# Altium PCB Kanaloa_v2.0.0_GPIO_b.PcbDoc
Units mil, origin at the board's own origin, x right, y up, seen from the top; angles counter-clockwise.
Board outline 6000 x 5000 mil, 2 copper layers (Top Layer, Bottom Layer), stack 11 mil thick; 43 components, 97 nets, 357 pads, 58 vias.
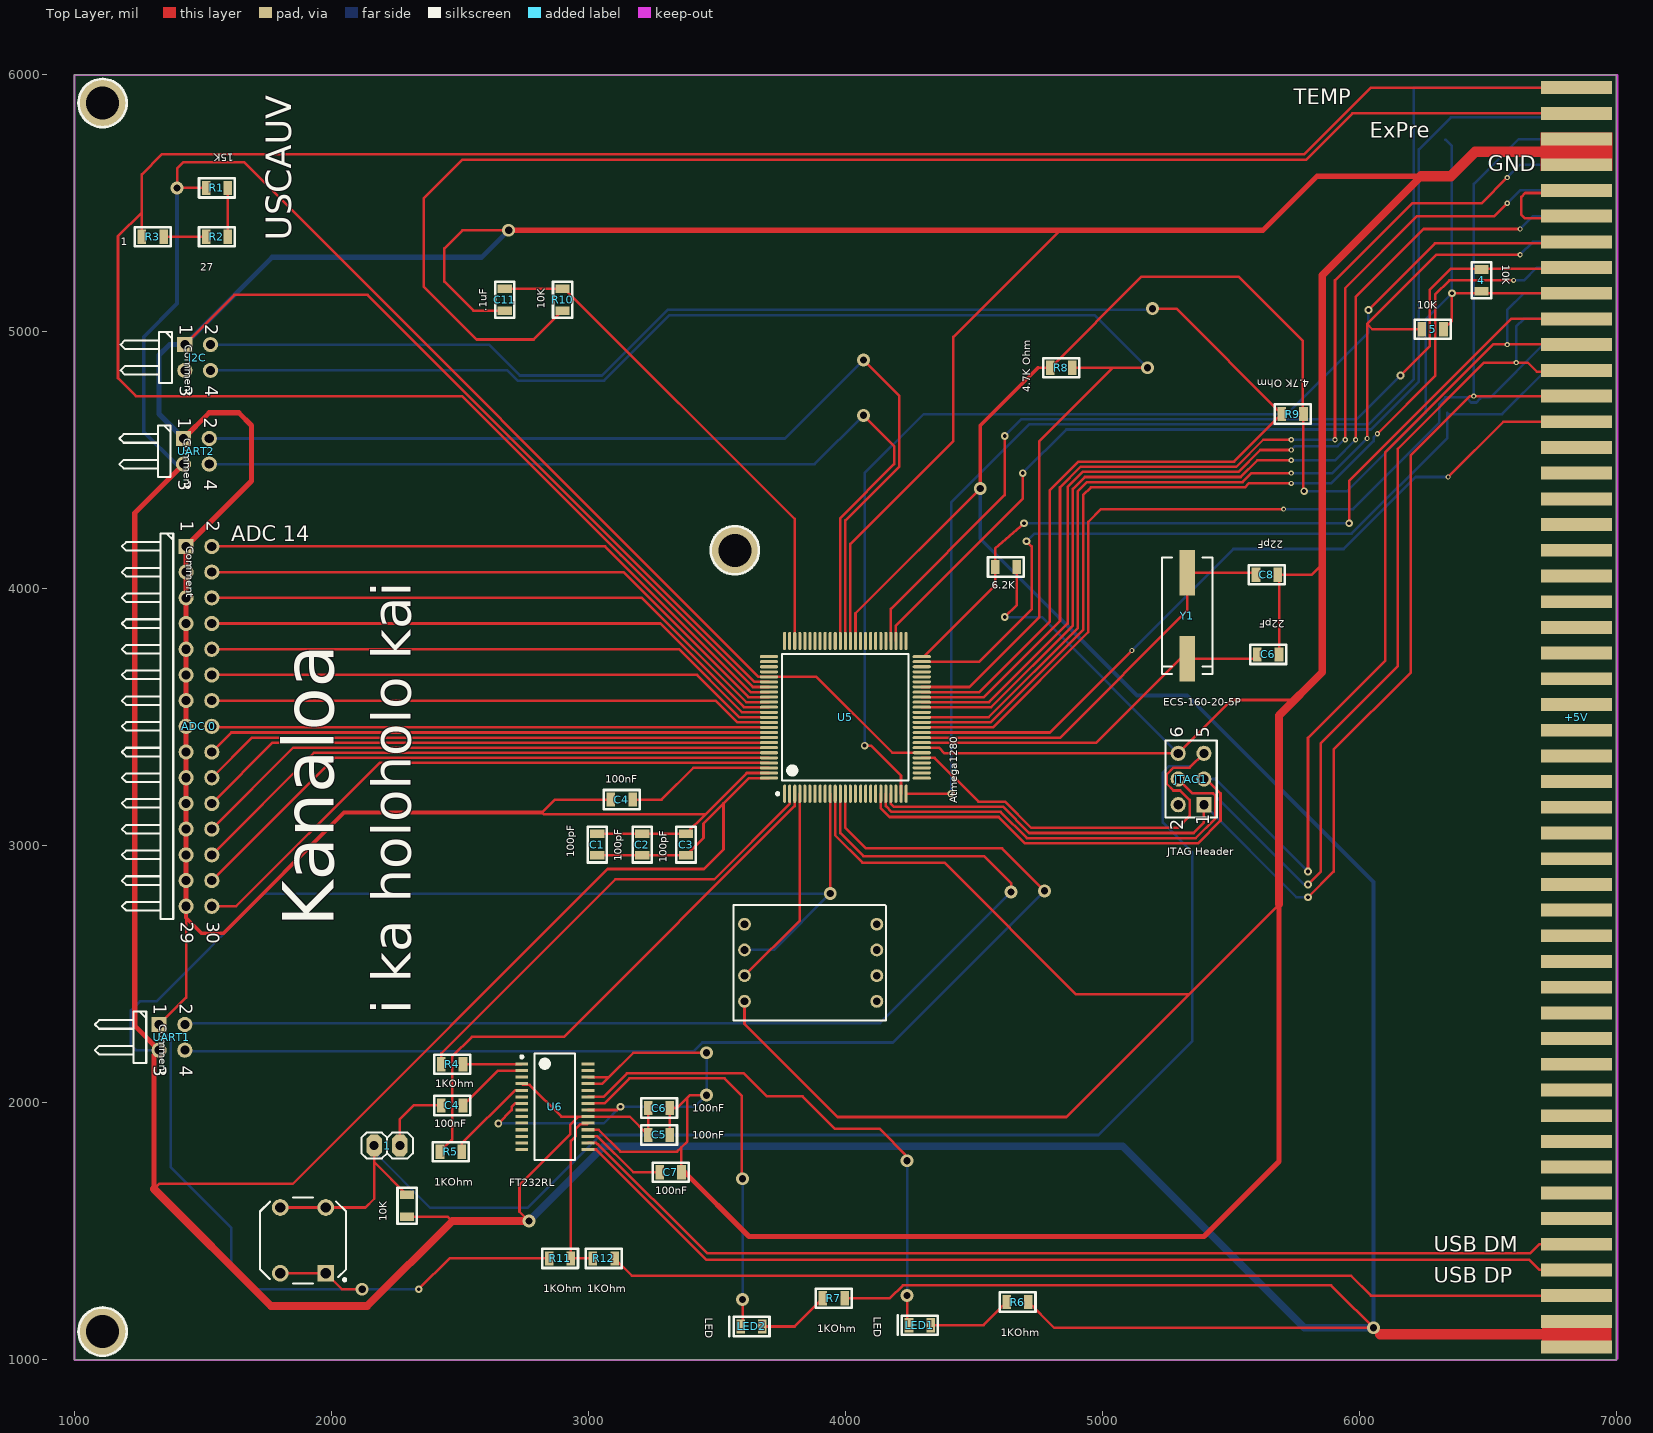
[diagram p0: Top Layer view]
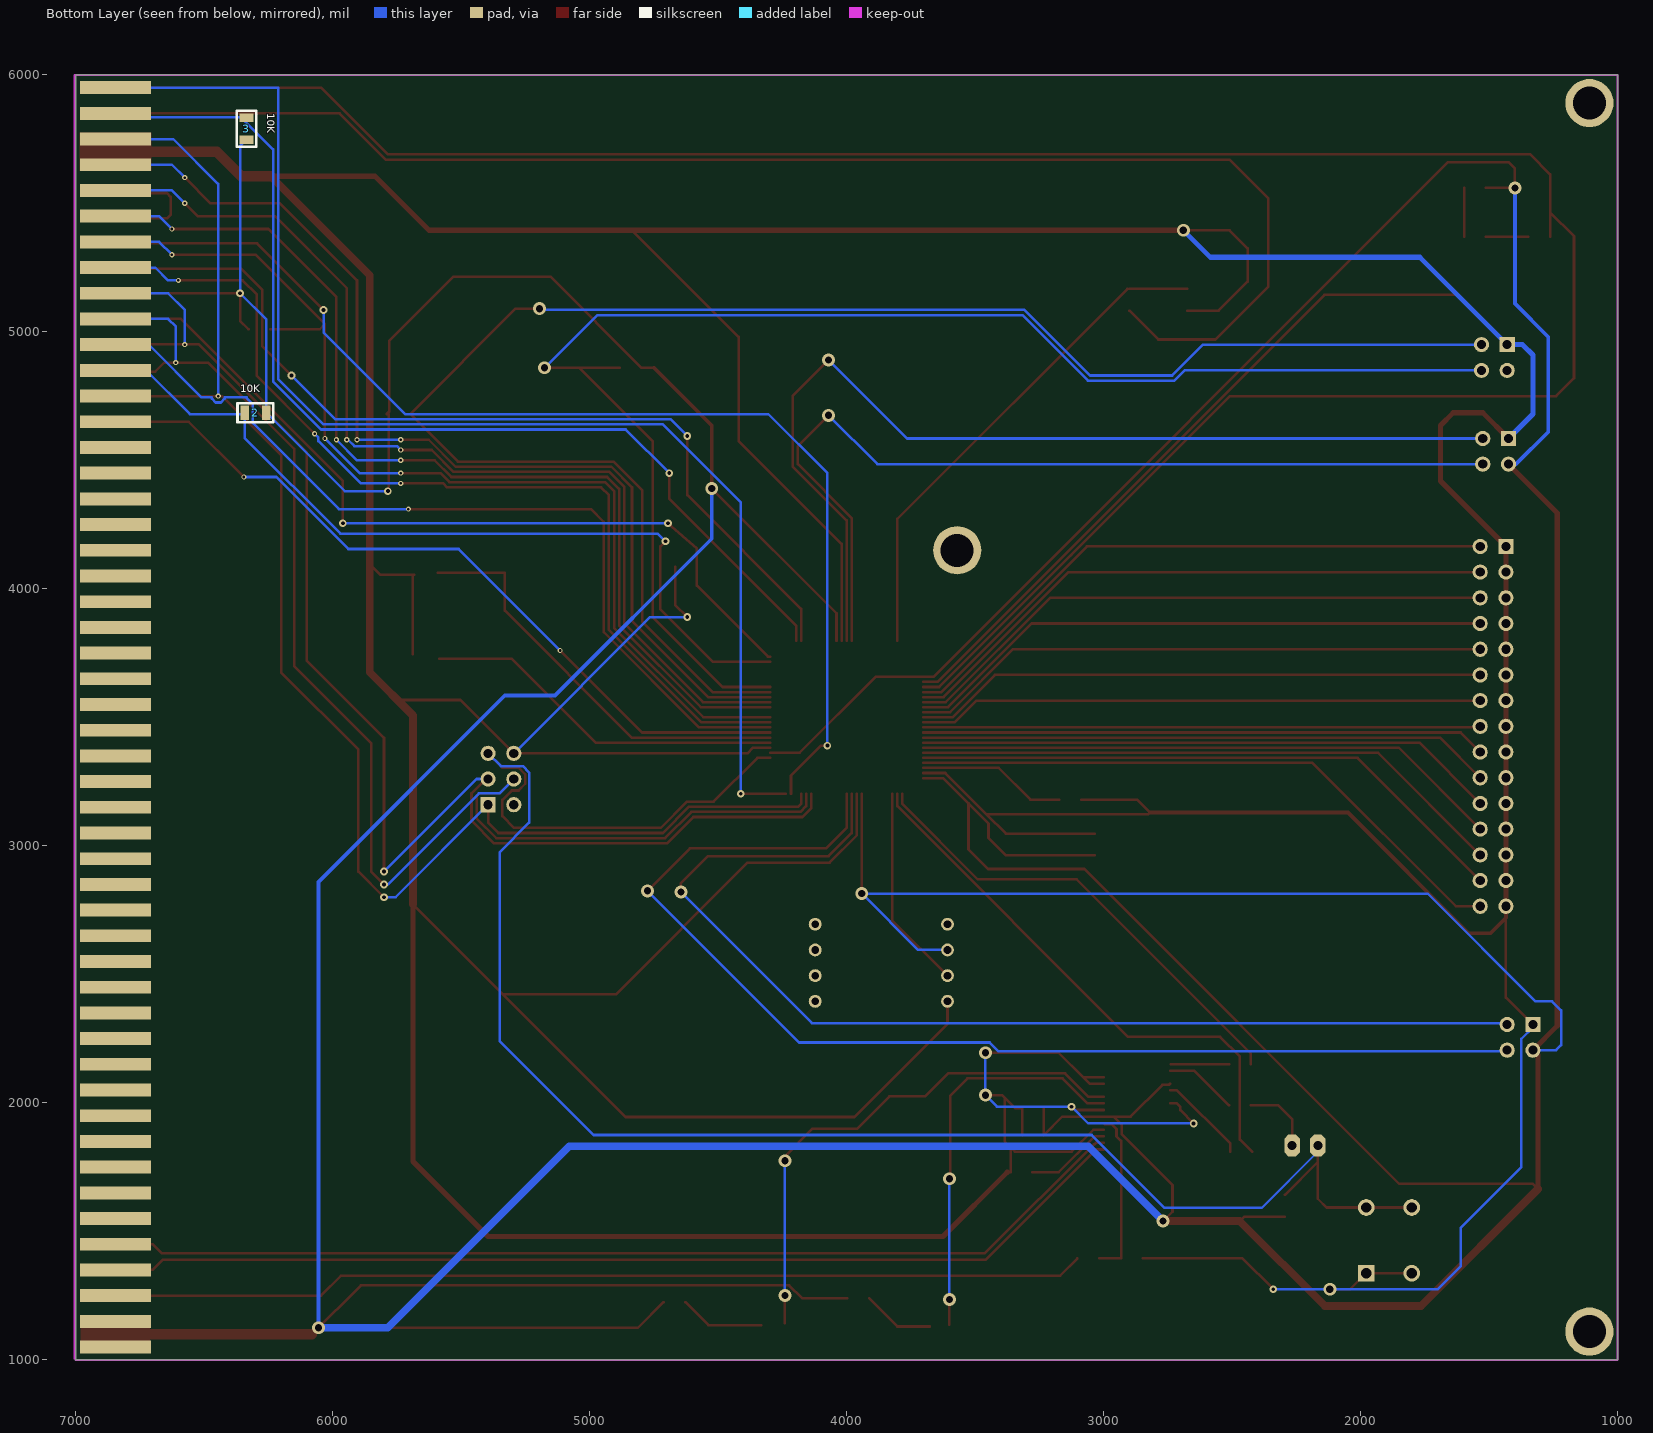
[diagram p1: Bottom Layer view, seen from below]

## Layer stack, top to bottom
Top Layer: signal copper 1.4
Dielectric: core 8.2, FR-4, Dk 4.8
Bottom Layer: signal copper 1.4

## Board outline
1000,1000 7000,1000 7000,6000 1000,6000

## Design rules (kind name [scope] priority, off if disabled: settings)
Clearance [All] p1: gap=10
DiffPairsRouting [All] p1: maxlimit=10 minlimit=10 mostfreqgap=10 maxuncoupledlength=500
PolygonConnect [All] p1: connectstyle=Relief reliefconductorwidth=10 reliefentries=4 polygonreliefangle="90 Angle"
RoutingVias [All] p1: holewidth=28 width=50 viastyle="Through Hole" minholewidth=28 minwidth=50 maxholewidth=28 maxwidth=50
SilkscreenOverComponentPads [All] p1: minsilkscreentomaskgap=10
SolderMaskExpansion [All] p1: expansion=4
Width [All] p1: maxlimit=50 minlimit=10 preferedwidth=10
26 further rules are at their usual default settings.

## Classes and differential pairs
component class Kanaloa_v2.0.0_GPIO: R1 R2 R3
differential pair NewDifferentialPair1: +"USB DP" -"USB DM"

## Components (designator, comment, footprint, x,y, rotation, side; value= is the part's Value field where it differs from the comment)
1 "" "Male 2X1" 2167,1834 r0 top
2 "10K" "R 0805 (2012) RESISTOR" 6300,4685 r0 bottom
3 "10K" "R 0805 (2012) RESISTOR" 6335,5790 r90 bottom
4 "10K" "R 0805 (2012) RESISTOR" 6475,5200 r90 top
5 "10K" "R 0805 (2012) RESISTOR" 6285,5010 r180 top
+5V "" "5645235-3 CON - duplicate" 6845,1050 r90 top
"ADC 0" "Comment" HDR2X15H 1435,4165 r270 top
C1 "100pF" "0805 (2012) Capacitor" 3035,3005 r270 top
C2 "100pF" "0805 (2012) Capacitor" 3210,3005 r270 top
C3 "100pF" "0805 (2012) Capacitor" 3380,3005 r270 top
C4 "100nF" "0805 (2012) Capacitor" 2470,1990 r0 top
C4 "100nF" "0805 (2012) Capacitor" 3130,3180 r0 top (schematic designator C5)
C5 "100nF" "0805 (2012) Capacitor" 3275,1875 r0 top
C6 "22pF" "0805 (2012) Capacitor" 5645,3745 r180 top
C6 "100nF" "0805 (2012) Capacitor" 3275,1980 r0 top
C7 "100nF" "0805 (2012) Capacitor" 3320,1730 r0 top
C8 "22pF" "0805 (2012) Capacitor" 5640,4055 r180 top
C11 ".1uF" "0805 (2012) Capacitor" 2675,5125 r270 top
I2C "Comment" HDR2X2H 1430,4950 r270 top
JTAG1 "JTAG Header" HDR2X3 5395,3160 r90 top
LED1 "LED" "LED 0805" 4290,1135 r0 top
LED2 "LED" "LED 0805" 3635,1130 r0 top
R1 "15K" "R 0805 (2012) RESISTOR" 1555,5560 r180 top
R2 "27" "R 0805 (2012) RESISTOR" 1555,5370 r0 top
R3 "1" "R 0805 (2012) RESISTOR" 1305,5370 r0 top
R4 "1KOhm" "R 0805 (2012) RESISTOR" 2470,2150 r0 top
R5 "1KOhm" "R 0805 (2012) RESISTOR" 2465,1810 r0 top
R6 "1KOhm" "R 0805 (2012) RESISTOR" 4670,1225 r0 top
R7 "1KOhm" "R 0805 (2012) RESISTOR" 3955,1240 r0 top
R8 "4.7K Ohm" "R 0805 (2012) RESISTOR" 4840,4860 r180 top
R9 "4.7K Ohm" "R 0805 (2012) RESISTOR" 5740,4680 r180 top
R10 "10K" "R 0805 (2012) RESISTOR" 2900,5125 r270 top
R11 "1KOhm" "R 0805 (2012) RESISTOR" 2890,1395 r0 top (schematic designator R5)
R12 "1KOhm" "R 0805 (2012) RESISTOR" 3060,1395 r0 top (schematic designator R5)
U5 "Atmega1280" TSQFP50P1600X1600X120-100N 4000,3500 r90 top
U6 "FT232RL" SOP65P780X200-28N 2870,1985 r0 top
UART1 "Comment" HDR2X2H 1330,2305 r270 top
UART2 "Comment" HDR2X2H 1425,4585 r270 top
Y1 "ECS-160-20-5P" CSM-7 5330,3895 r90 top
? "" B3F 1890,1465 r90 top
? "10K" "R 0805 (2012) RESISTOR" 2295,1600 r270 top
? "" SSCDANT150PGAA5 3865,2545 r0 top
? "6.2K" "R 0805 (2012) RESISTOR" 4625,4085 r180 top

## Footprints (in the part's own frame and the unit in brackets; to place one, negate y for a bottom-side part, rotate by r counter-clockwise, add the part's x,y. Pads: shape width x height; smd on the part's side, far side on the other; paste and mask are expansions set on the pad)
"0805 (2012) Capacitor" [mm] "0805 (2012) Capacitor"
  rect 0.85x1.4 smd: 1(-1.075,0) 2(1.075,0)
  silkscreen extent -1.78,-0.95 1.78,0.95, body extent -1.19,-0.65 1.19,0.65, height 0.85
"5645235-3 CON - duplicate" [mil]
  rect 50x275 smd: 0(0,0) 1(100,0) 2(200,0) 3(300,0) 4(400,0) 5(500,0) 6(600,0) 7(700,0) 8(800,0) 9(900,0) 10(1000,0) 11(1100,0) 12(1200,0) 13(1300,0) 14(1400,0) 15(1500,0) 16(1600,0) 17(1700,0) 18(1800,0) 19(1900,0) 20(2000,0) 21(2100,0) 22(2200,0) 23(2300,0) 24(2400,0) 25(2500,0) 26(2600,0) 27(2700,0) 28(2800,0) 29(2900,0) 30(3000,0) 31(3100,0) 32(3200,0) 33(3300,0) 34(3400,0) 35(3500,0) 36(3600,0) 37(3700,0) 38(3800,0) 39(3900,0) 40(4000,0) 41(4100,0) 42(4200,0) 43(4300,0) 44(4400,0) 45(4500,0) 46(4600,0) 47(4700,0) 48(4800,0) 49(4900,0)
  rect 50x275 smd far side: 50(0,0) 51(100,0) 52(200,0) 53(300,0) 54(400,0) 55(500,0) 56(600,0) 57(700,0) 58(800,0) 59(900,0) 60(1000,0) 61(1100,0) 62(1200,0) 63(1300,0) 64(1400,0) 65(1500,0) 66(1600,0) 67(1700,0) 68(1800,0) 69(1900,0) 70(2000,0) 71(2100,0) 72(2200,0) 73(2300,0) 74(2400,0) 75(2500,0) 76(2600,0) 77(2700,0) 78(2800,0) 79(2900,0) 80(3000,0) 81(3100,0) 82(3200,0) 83(3300,0) 84(3400,0) 85(3500,0) 86(3600,0) 87(3700,0) 88(3800,0) 89(3900,0) 90(4000,0) 91(4100,0) 92(4200,0) 93(4300,0) 94(4400,0) 95(4500,0) 96(4600,0) 97(4700,0) 98(4800,0) 99(4900,0)
B3F [mm]
  rect 1.65x1.65 hole 1: 1(-3.25,-2.25)
  round 1.65 hole 1: 2(3.25,-2.25) 3(-3.25,2.25) 4(3.25,2.25)
  silkscreen extent -4.25,-4.25 4.25,4.25
CSM-7 [mm] "Quartz Crystal, SM; 2 Leads; Body 11.4 x 4.8 x 5 mm (LxWxH)"
  rect 4.5x1.5 smd: 1(-4.25,0) 2(4.25,0)
  silkscreen extent -5.75,-2.5 5.75,2.5
HDR2X2H [mm] "Connector; Header; 2x2 Position; Right Angle"
  rect 1.5x1.5 hole 0.9: 1(0,0)
  round 1.5 hole 0.9: 2(0,2.54) 3(2.54,0) 4(2.54,2.54)
  silkscreen extent -1.27,-6.35 3.81,-1.27
HDR2X3 [mm] "Connector; Header; 3x2 Position"
  rect 1.5x1.5 hole 0.9: 1(0,0)
  round 1.5 hole 0.9: 2(0,2.54) 3(2.54,0) 4(2.54,2.54) 5(5.08,0) 6(5.08,2.54)
  silkscreen extent -1.27,-1.27 6.35,3.81
HDR2X15H [mm] "Connector; Header; 15x2 Position; Right Angle"
  rect 1.5x1.5 hole 0.9: 1(0,0)
  round 1.5 hole 0.9: 2(0,2.54) 3(2.54,0) 4(2.54,2.54) 5(5.08,0) 6(5.08,2.54) 7(7.62,0) 8(7.62,2.54) 9(10.16,0) 10(10.16,2.54) 11(12.7,0) 12(12.7,2.54) 13(15.24,0) 14(15.24,2.54) 15(17.78,0) 16(17.78,2.54) 17(20.32,0) 18(20.32,2.54) 19(22.86,0) 20(22.86,2.54) 21(25.4,0) 22(25.4,2.54) 23(27.94,0) 24(27.94,2.54) 25(30.48,0) 26(30.48,2.54) 27(33.02,0) 28(33.02,2.54) 29(35.56,0) 30(35.56,2.54)
  silkscreen extent -1.27,-6.35 36.83,-1.27
"LED 0805" [mm]
  rect 0.85x1.4 smd: 1(-1.075,0) 2(1.075,0)
  silkscreen extent -2.18,-0.95 1.78,0.97, body extent -1.19,-0.65 1.19,0.65, height 0.87
"Male 2X1" [mil]
  oct 60x85 hole 35: 1(0,0) 2(100,0)
  silkscreen extent -50,-50 150,50, body extent -50,-50 150,50, height 460
"R 0805 (2012) RESISTOR" [mm] "0805 (2012) Resistor"
  rect 0.85x1.4 smd: 1(-1.075,0) 2(1.075,0)
  silkscreen extent -1.78,-0.95 1.78,0.95, body extent -1.19,-0.65 1.19,0.65, height 0.85
SOP65P780X200-28N [mm] "SOP, 28-Leads, Body 10.5x5.6mm (max), Pitch 0.65mm, IPC Medium Density"
  rect 1.25x0.3 smd: 1(-3.275,4.225) 2(-3.275,3.575) 3(-3.275,2.925) 4(-3.275,2.275) 5(-3.275,1.625) 6(-3.275,0.975) 7(-3.275,0.325) 8(-3.275,-0.325) 9(-3.275,-0.975) 10(-3.275,-1.625) 11(-3.275,-2.275) 12(-3.275,-2.925) 13(-3.275,-3.575) 14(-3.275,-4.225) 15(3.275,-4.225) 16(3.275,-3.575) 17(3.275,-2.925) 18(3.275,-2.275) 19(3.275,-1.625) 20(3.275,-0.975) 21(3.275,-0.325) 22(3.275,0.325) 23(3.275,0.975) 24(3.275,1.625) 25(3.275,2.275) 26(3.275,2.925) 27(3.275,3.575) 28(3.275,4.225)
  silkscreen extent -3.4,-5.25 2,5.25, body extent -2.8,-5.25 2.8,5.25, height 2
SSCDANT150PGAA5 [mil] "Sensor Pres 150PSI GAUGE 5V ANLG"
  round 50 hole 30: 1(-257.5,150) 2(-257.5,50) 3(-257.5,-50) 4(-257.5,-150) 5(257.5,-150) 6(257.5,-50) 7(257.5,50) 8(257.5,150)
  silkscreen extent -300,-224 292,224, body extent -255,-197 255,197, height 583
TSQFP50P1600X1600X120-100N [mm] "TSQFP, 100-Leads, Body 16.3x16.3mm (max), Pitch 0.50mm, IPC Medium Density"
  oval 1.8x0.3 smd: 1(-7.55,6) 2(-7.55,5.5) 3(-7.55,5) 4(-7.55,4.5) 5(-7.55,4) 6(-7.55,3.5) 7(-7.55,3) 8(-7.55,2.5) 9(-7.55,2) 10(-7.55,1.5) 11(-7.55,1) 12(-7.55,0.5) 13(-7.55,0) 14(-7.55,-0.5) 15(-7.55,-1) 16(-7.55,-1.5) 17(-7.55,-2) 18(-7.55,-2.5) 19(-7.55,-3) 20(-7.55,-3.5) 21(-7.55,-4) 22(-7.55,-4.5) 23(-7.55,-5) 24(-7.55,-5.5) 25(-7.55,-6) 51(7.55,-6) 52(7.55,-5.5) 53(7.55,-5) 54(7.55,-4.5) 55(7.55,-4) 56(7.55,-3.5) 57(7.55,-3) 58(7.55,-2.5) 59(7.55,-2) 60(7.55,-1.5) 61(7.55,-1) 62(7.55,-0.5) 63(7.55,0) 64(7.55,0.5) 65(7.55,1) 66(7.55,1.5) 67(7.55,2) 68(7.55,2.5) 69(7.55,3) 70(7.55,3.5) 71(7.55,4) 72(7.55,4.5) 73(7.55,5) 74(7.55,5.5) 75(7.55,6)
  oval 0.3x1.8 smd: 26(-6,-7.55) 27(-5.5,-7.55) 28(-5,-7.55) 29(-4.5,-7.55) 30(-4,-7.55) 31(-3.5,-7.55) 32(-3,-7.55) 33(-2.5,-7.55) 34(-2,-7.55) 35(-1.5,-7.55) 36(-1,-7.55) 37(-0.5,-7.55) 38(0,-7.55) 39(0.5,-7.55) 40(1,-7.55) 41(1.5,-7.55) 42(2,-7.55) 43(2.5,-7.55) 44(3,-7.55) 45(3.5,-7.55) 46(4,-7.55) 47(4.5,-7.55) 48(5,-7.55) 49(5.5,-7.55) 50(6,-7.55) 76(6,7.55) 77(5.5,7.55) 78(5,7.55) 79(4.5,7.55) 80(4,7.55) 81(3.5,7.55) 82(3,7.55) 83(2.5,7.55) 84(2,7.55) 85(1.5,7.55) 86(1,7.55) 87(0.5,7.55) 88(0,7.55) 89(-0.5,7.55) 90(-1,7.55) 91(-1.5,7.55) 92(-2,7.55) 93(-2.5,7.55) 94(-3,7.55) 95(-3.5,7.55) 96(-4,7.55) 97(-4.5,7.55) 98(-5,7.55) 99(-5.5,7.55) 100(-6,7.55)
  silkscreen extent -7.67,-6.25 6.25,6.82, body extent -7,-7 7,7, height 1.2

## Part data
"ADC 0": library part "Header 15X2H"
C1 C2 C3 C6 C8: library part Cap, "Capacitor"
C4 C4 C5: library part "Capacitor (non-polarized)", "Capacitor"
JTAG1: library part "Header 3X2", "Header, 3-Pin, Dual row"
LED1 LED2: "Standard LED"
R1 R2 R3 R4 R5 R6 R7 R8 R9 R11 R12: library part Resistor, "Resistor"
UART1 UART2: library part "Header 2X2H"
Y1: library part ECS-120-32-1, "Crystal Oscillator"

## Free pads (board coordinates)
  round 187.5 hole 128.5: 0(1110,5890) 1(1110,1110) 2(3570,4150)

## Via types
v1: diameter 20, hole 10, Top Layer to Bottom Layer, 20 vias
v2: diameter 50, hole 28, Top Layer to Bottom Layer, 19 vias
v3: diameter 30, hole 15, Top Layer to Bottom Layer, 18 vias
v4: diameter 20, hole 10, Top Layer to Bottom Layer, tented bottom, 1 vias

## Nets (pads, with @x,y where several pads share a name; then routed paths per layer and width w, separated by ;. In a path a pad name is that pad's centre, name@x,y a point inside that pad or via, vN(x,y) a via of type N, cw(c..) or ccw(c..) an arc to the next point about the centre after c; other vN are vias at no path point)
3V3OUT: C7.1 U6.17 | length 336.7
  Top Layer w10: U6.17 3035.39,1869.84 3175.23,1730 C7.1
+5V: 2.1 3.1 4.1 5.1 +5V.0 +5V.1 +5V.41 ?.2@2295,1557.68 ?.2@3607.5,2595 C1.2 C2.2 C3.2 C5.1 C6.1@3232.68,1980 R1.2 R6.2 R7.2 R8.2 R9.1 U5.10 U5.31 U5.61 U5.80 U5.100 U6.4 U6.20 UART1.3 UART2.3 | length 36746.1
  Top Layer w10: 1310,1665 1330,1685 1850,1685 3075,2910 3450,2910 3525.96,2985.96 3525.96,3165 ; UART1.3@1310,2185 UART1.3 ; R1.2 v2(1400,5560) 1400,5635 1425,5660 1660,5660 3662.52,3657.48 U5.80 3887.52,3657.48 4182.8,3362.2 U5.31 ; ?.2@2295,1557.68 2452.32,1557.68 2470,1540 ; U6.4 2745.75,2069.88 2771.88,2069.88 2895.15,1946.61 2961.61,1946.61 ; v2(2768.64,1540) 2732.2,1576.44 2732.2,1680.43 2930,1878.22 2930,1915 2961.61,1946.61 ; C1.2 C2.2 C3.2 3447.98,3030.66 3447.98,3087.02 3525.96,3165 ; C6.1@3232.68,1980 C5.1 3161.06,1946.61 U6.20 2961.61,1946.61 ; U5.100 3624.74,3263.78 3525.96,3165 ; v2(3940.94,2814.06) U5.10 ; R7.2 4173.43,1240 4223.43,1290 5890,1290 6080,1100 ; U5.61 4039.37,3904.37 ; 4040,3905 v2(4525,4390) ; R6.2 4812.32,1125 v2(6055,1125) ; 4750,4860 R8.2 5152.68,5215 5530,5215 5780,4965 5780,4690 R9.1@5790,4680 ; R9.1 5782.32,4382.68 v3(5785,4380) ; 5.1 6360,5042.68 v3(6360,5150) 6843,5150 +5V.41@6845,5148
  Top Layer w15: v2(4525,4390) 4525,4635 4750,4860
  Top Layer w20: 1310,1665 UART1.3@1310,2185 ; UART1.3 1235,2300 1235,4295 UART2.3
  Top Layer w30: 1310,1665 1765,1210 2140,1210 2470,1540 v2(2768.64,1540)
  Top Layer w40: 6080,1100 6815,1100 +5V.1@6845,1130
  Bottom Layer w10: UART1.3 1240,2205 1220,2225 1220,2360 1255,2395 1320,2395 1739.06,2814.06 v2(3940.94,2814.06) 3721.89,2595 ?.2@3607.5,2595 ; 1395,4485 UART2.3 ; v3(5785,4380) 5952.68,4380 2.1 6257.68,5047.68 v3(6360,5150) 6360,5722.68 3.1
  Bottom Layer w15: 1395,4485 1270,4610 1270,4980 1400,5110 v2(1400,5560) ; v2(4525,4390) 4525,4195 5135,3585 5330,3585 6055,2860 v2(6055,1125)
  Bottom Layer w30: v2(2768.64,1540) 3060,1831.36 5078.64,1831.36 5785,1125 v2(6055,1125)
ADC0: "ADC 0.30" U5.97 | length 2398.8
  Top Layer w10: 1535,2765 1630,2765 2187.83,3322.83 U5.97
ADC1: "ADC 0.28" U5.96 | length 2365.6
  Top Layer w10: 1535,2865 2012.52,3342.52 U5.96
ADC2: "ADC 0.26" U5.95 | length 2332.3
  Top Layer w10: 1535,2965 1932.2,3362.2 U5.95
ADC3: "ADC 0.24" U5.94 | length 2299
  Top Layer w10: 1535,3065 1851.89,3381.89 U5.94
ADC4: "ADC 0.22" U5.93 | length 2265.7
  Top Layer w10: 1535,3165 1771.57,3401.57 U5.93
ADC5: "ADC 0.20" U5.92 | length 2232.5
  Top Layer w10: 1535,3265 1691.26,3421.26 U5.92
ADC6: "ADC 0.18" U5.91 | length 2199.2
  Top Layer w10: 1535,3365 1610.94,3440.94 U5.91
ADC7: "ADC 0.16" U5.90 | length 2164.3
  Top Layer w10: 1540,3460 1539.37,3460.63 U5.90
ADC8: "ADC 0.14" U5.89 | length 2202.4
  Top Layer w10: 1535,3565 3495.29,3565 3579.66,3480.63 ; 3579.98,3480.32 U5.89
ADC9: "ADC 0.12" U5.88 | length 2236.1
  Top Layer w10: 1535,3665 3423.58,3665 3588.58,3500 U5.88
ADC10: "ADC 0.10" U5.87 | length 2268.9
  Top Layer w10: 1535,3765 3351.86,3765 3596.86,3520 ; 3597.18,3519.68 U5.87
ADC11: "ADC 0.8" U5.86 | length 2302.6
  Top Layer w10: 1535,3865 3280.15,3865 3605.78,3539.37 U5.86
ADC12: "ADC 0.6" U5.85 | length 2335.9
  Top Layer w10: 1535,3965 3208.43,3965 3614.38,3559.06 U5.85
ADC13: "ADC 0.4" U5.84 | length 2369.2
  Top Layer w10: 1535,4065 3136.72,4065 3622.98,3578.74 U5.84
ADC14: "ADC 0.2" U5.83 | length 2402.4
  Top Layer w10: 1535,4165 3065,4165 3631.57,3598.43 U5.83
AREF: C4.2@3172.32,3180 U5.98 | length 581.4
  Top Layer w10: C4.2@3172.32,3180 3285,3180 3408.15,3303.15 U5.98
Blank: 5.2 +5V.93 U5.38 | length 4106.9
  Top Layer w10: U5.38 4420,3500 ; 4420,3500.32 4556.88,3500.32 4905,3848.43 4905,4380 4940,4415 5545.81,4415 5580.81,4450 v1(5735,4450) ; v1(6030,4585) 6030,5030 ; 5.2 6050,5010 6030,5030 ; v1(6625,5300) 6300,5300 6030,5030
  Bottom Layer w10: v1(5735,4450) 5895,4450 v1(6030,4585) ; v1(6625,5300) 6675,5350 +5V.93
ConStatus: +5V.44 +5V.45 | length 511.6
  Top Layer w10: +5V.44@6845,5442 6643,5442 6630,5455 6630,5525 6645,5540 +5V.45@6845,5540
CoolTemp1: 
CoolTemp2: +5V.40 ?.2@4582.68,4085 U5.50 | length 3269.5
  Top Layer w10: U5.50 4306.22,3736.22 4582.68,4012.68 4582.68,4085 4582.68,4157.68 v3(4695,4255) ; v3(5960,4255) 5960,4420 6590,5050 +5V.40
  Bottom Layer w10: v3(4695,4255) v3(5960,4255)
DCPRG: +5V.94 U5.40 | length 3975.7
  Top Layer w10: U5.40 4567.65,3539.37 4885,3856.72 4885,4388.28 4931.72,4435 5537.53,4435 5602.53,4500 v1(5735,4500) ; v1(5985,4580) 5985,5135 6250,5400 v1(6625,5400)
  Bottom Layer w10: v1(5735,4500) 5905,4500 v1(5985,4580) ; v1(6625,5400) 6675,5450 +5V.94
ExPre: +5V.48 R10.2 | length 5644.9
  Top Layer w10: R10.2 2787.32,4970 2565,4970 2360,5175 2360,5520 2510,5670 5793.28,5670 5973.28,5850 6829,5850 +5V.48@6845,5834
FanPWM: +5V.43 U5.24 | length 4512.1
  Top Layer w10: v3(4075,3390) 4100,3390 4216.54,3273.46 U5.24 ; v3(6035,5085) 6294,5344 +5V.43@6845,5344
  Bottom Layer w10: v3(4075,3390) 4075,4450 4305,4680 5717.57,4680 6035,4997.43 v3(6035,5085)
FanRPM: 4.2 +5V.42 U5.54 | length 3604.7
  Top Layer w10: U5.54 4177.17,3922.17 4620,4365 v3(4620,4595) ; v3(6160,4830) 6274.41,4944.41 6274.41,5164.41 6356,5246 +5V.42@6845,5246
  Bottom Layer w10: v3(4620,4595) 4685,4660 5990,4660 v3(6160,4830)
FlowmeterRpm: 2.2 +5V.88 U5.49 | length 3252.4
  Top Layer w10: U5.49 4521.54,3716.54 4725,3920 4725,4165 v3(4705,4185)
  Bottom Layer w10: v3(4705,4185) 4735,4215 5970,4215 6342.32,4587.32 2.2 ; 2.2@6350,4680 6555,4680 6725,4850 +5V.88
GND: "ADC 0.1" "ADC 0.3" "ADC 0.5" "ADC 0.7" "ADC 0.9" "ADC 0.11" "ADC 0.13" "ADC 0.15" "ADC 0.17" "ADC 0.19" "ADC 0.21" "ADC 0.23" "ADC 0.25" "ADC 0.27" "ADC 0.29" +5V.46 +5V.47 ?.1@1978.58,1337.05 ?.1@4667.32,4085 ?.3@1801.42,1337.05 ?.4@3607.5,2395 C1.1 C2.1 C3.1 C4.1@3087.68,3180 C5.2 C6.1@5687.32,3745 C6.2@3317.32,1980 C7.2 C8.1 C11.2 I2C.1 JTAG1.6 R11.1 U5.11 U5.32 U5.62 U5.81 U5.99 U6.7 U6.18 U6.21 U6.25 U6.26 UART1.1 UART2.1 | length 37752.4
  Top Layer w10: UART1.1 1435,2410 1435,2720 ; I2C.1 1623.43,5143.43 2141.57,5143.43 3647.2,3637.8 U5.81 ; ?.3@1801.42,1337.05 1978.58,1337.05 2040.63,1275 v2(2120,1275) ; v3(2340,1275) 2460,1395 R11.1 ; v3(2650,1920) 2701.46,1971.46 2701.46,1984.32 2714.93,1997.8 U6.7 ; C11.2 2552.32,5082.68 2440,5195 2440,5325 2510,5395 v2(2690,5395) ; U6.18 3039.57,1895.43 3125,1810 3345,1810 3362.32,1827.32 ; U6.21 3112.2,1972.2 v3(3125,1985) ; U6.25 3054.57,2074.57 3080.16,2100.16 ; U6.26 3080.16,2100.16 ; C1.1 C2.1 C3.1 3455,3122.32 ; C4.1@3087.68,3180 2870,3180 2820,3130 2827.68,3122.32 3455,3122.32 ; C5.2 3317.32,1980 3345,1980 3385,2020 ; C7.2 3362.32,1827.32 ; v2(3460,2030) 3395,2030 3385,2020 ; v2(3460,2195) 3175,2195 3080.16,2100.16 ; ?.4@3607.5,2395 3607.5,2307.5 3970,1945 4860,1945 5337.5,2422.5 ; 3614.7,3282.02 3455,3122.32 ; 3616.14,3283.46 U5.99 ; U5.11 3960.63,3041.09 4066.72,2935 4385,2935 4897.5,2422.5 5337.5,2422.5 ; U5.62 4019.68,4174.69 ; 4020,4175 4420,4575 4420,4980 4835,5395 ; U5.32 4364.68,3381.89 4386.57,3360 JTAG1.6 ; v3(4620,3890) 4667.32,3937.32 ?.1@4667.32,4085 ; JTAG1.6@5302.32,3360 JTAG1.6 ; C8.1 5815,4055 5855,4095 ; 5687.32,2772.32 5337.5,2422.5 ; C6.1@5687.32,3745 C8.1@5687.32,4050 ; 5737.5,3567.5 5502.5,3567.5 JTAG1.6 ; +5V.47@6840,5731 6871,5700 ; 3362.32,1827.32 3385,1850 3385,2020
  Top Layer w15: 1435,2765 1435,2720 1495,2660 1580,2660 2050,3130 2820,3130
  Top Layer w20: UART2.1 1525,4685 1640,4685 1690,4635 1690,4420 1435,4165 1435,4065 1435,3965 1435,3865 1435,3765 1435,3665 1435,3565 1435,3465 1435,3365 1435,3265 1435,3165 1435,3065 1435,2965 1435,2865 1435,2765 ; v2(2690,5395) 4835,5395 5625,5395 5835,5605 6240,5605 ; C7.2@3375,1730 3625,1480 5395,1480 5687.32,1772.32 5687.32,2772.32
  Top Layer w30: 5687.32,2772.32 5687.32,3507.32 5855,3675 5855,4095 5855,5220 6240,5605
  Top Layer w40: 6240,5605 6355,5605 6450,5700 6871,5700
  Bottom Layer w10: UART1.1 1330,2294.06 1374.53,2249.53 1374.53,1750 1610,1514.53 1610,1365 1700,1275 v2(2120,1275) v3(2340,1275) ; v3(2650,1920) 3060,1920 v3(3125,1985) 3415,1985 v2(3460,2030) v2(3460,2195) ; v3(4620,3890) 4765,3890 JTAG1.6
  Bottom Layer w20: UART2.1 1330,4680 1330,4910 1370,4950 I2C.1 1770,5290 2585,5290 v2(2690,5395)
GSCLK: +5V.95 U5.41 | length 4029.4
  Top Layer w10: U5.41 4559.06,3559.06 4865,3865 4865,4396.57 4923.43,4455 5529.25,4455 5614.25,4540 v1(5735,4540) ; v4(5945,4580) 5945,5170 6225,5450 6525,5450 v1(6575,5500)
  Bottom Layer w10: v1(5735,4540) 5750,4555 5915.36,4555 5940.36,4580 v4(5945,4580) ; v1(6575,5500) 6625,5550 +5V.95
Int_Press_Output: ?.3@3607.5,2495 U5.4 | length 805.3
  Top Layer w10: ?.3@3607.5,2495 3822.83,2710.33 3822.83,2967.17 3822.83,3163.35 ; 3822.83,3155 U5.4
LED_sel: 
MISO: +5V.37 +5V.97 JTAG1.1 U5.22 | length 5870.4
  Top Layer w10: 4177.17,3163.35 U5.22 ; 4177.42,3163.09 4188.19,3152.32 4612.68,3152.32 4715,3050 5355,3050 5395,3090 JTAG1.1 ; v3(5800,2800) 5900,2900 5900,3375 6200,3675 6200,4520 6430,4750 v1(6445,4750) 6839,4750 +5V.37@6845,4756
  Bottom Layer w10: JTAG1.1 5755,2800 v3(5800,2800) ; v1(6445,4750) 6445,5575 6620,5750 +5V.97
"MISO_Sensor Boom": 
MOSI: +5V.38 +5V.90 JTAG1.4 U5.21 | length 5436.6
  Top Layer w10: 4157.42,3163.29 4157.42,3154.81 4179.91,3132.32 4604.39,3132.32 4706.72,3030 5363.28,3030 5439.53,3106.24 5439.53,3195.74 5430.74,3204.53 5350.47,3204.53 JTAG1.4 ; 4157.48,3154.87 U5.21 ; v3(5800,2850) 5850,2900 5850,3400 6150,3700 6150,4545 6485,4880 v1(6610,4880) 6655,4880 6690,4845 6836,4845 +5V.38@6845,4854
  Bottom Layer w10: JTAG1.4 5350.47,3204.53 5430.74,3204.53 5785.27,2850 v3(5800,2850) ; v1(6610,4880) 6610,5020 6640,5050 +5V.90
"MOSI_Sensor Boom": 
Net_1: 
Net_2: U5.9
Net_5: U5.8
NetC4_2: C4.2@2512.32,1990 U6.2 | length 285
  Top Layer w10: C4.2@2512.32,1990 2648.07,2125.75 U6.2
NetC7_1: C11.1 R10.1 U5.73 | length 1966
  Top Layer w10: C11.1 R10.1 ; R10.1@2907.68,5167.32 3803.15,4271.85 U5.73
NetR1_1: R1.1 R2.2 | length 190
  Top Layer w10: R2.2 R1.1
NetR2_1: R2.1 R3.2 | length 165.4
  Top Layer w10: R3.2 R2.1
NetR4_2: R4.2 U6.1 | length 227.4
  Top Layer w10: R4.2 U6.1@2739.72,2150
NetR5_2: R5.2 U6.5 | length 351.1
  Top Layer w10: R5.2 2507.32,1841.37 2714.93,2048.98 U6.5
NetU5_82: 
NetU5_83: 
NetU5_84: 
NetU5_85: 
NetU5_86: 
NetU5_87: 
NetU5_88: 
NetU5_89: 
NetU5_90: 
NetU5_91: 
NetU5_92: 
NetU5_93: 
NetU5_94: 
NetU5_95: 
NetU5_96: 
NetU5_97: 
NetUC_RESET1_1: 
PD7: 
prejumpreset: 1.2 C4.1@2427.68,1990 | length 285.6
  Top Layer w10: 1.2 2267,1937 2320,1990 C4.1@2427.68,1990
PumpPWM: +5V.99 U5.25 | length 5082.6
  Top Layer w10: U5.25 v3(4412.24,3202.76)
  Bottom Layer w10: v3(4412.24,3202.76) 4412.24,4337.24 4715,4640 6035,4640 6211.72,4816.72 6211.72,5950 6827,5950 +5V.99@6845,5932
PumpRPM: 3.2 +5V.98 U5.53 | length 4114.4
  Top Layer w10: U5.53 4196.85,3856.85 4690,4350 v3(4690,4450)
  Bottom Layer w10: v3(4690,4450) 4860,4620 6045,4620 6231.72,4806.72 6231.72,5709.9 6355.82,5834 +5V.98@6845,5834
RESET: 1.1 ?.1@2295,1642.32 ?.2@1978.58,1592.95 ?.4@1801.42,1592.95 JTAG1.5 U5.30 | length 7186.1
  Top Layer w10: ?.4@1801.42,1592.95 1978.58,1592.95 2130.63,1592.95 2131.79,1591.79 2167,1627 2167,1770.32 ; 1.1 2167,1770.32 ; ?.1@2295,1642.32 2167,1770.32 ; U5.30 4347.48,3342.52 4517.68,3172.32 4620.96,3172.32 4723.28,3070 5294.06,3070 5339.53,3115.47 5339.53,3178.44 5302.5,3215.47 5276.56,3215.47 5250.47,3241.56 5250.47,3278.44 5276.56,3304.53 5339.53,3304.53 JTAG1.5
  Bottom Layer w10: 1.1 2167,1809.79 2385,1591.79 2763.87,1591.79 3047.07,1875 4985,1875 5350.47,2240.47 5350.47,2974.53 5235,3090 5235,3285 5260,3310 5345,3310 JTAG1.5
reset#: R11.2 R12.1 U6.19 | length 654.3
  Top Layer w10: U6.19 2994.25,1916.34 2968.12,1916.34 2950,1898.22 2950,1869.94 2932.32,1852.26 R11.2 R12.1
RLED: LED2.2 R7.1 | length 280.9
  Top Layer w10: LED2.2 3802.68,1130 R7.1
RX2: U5.12 UART1.2 | length 4359.6
  Top Layer w10: U5.12 3980.32,3049.68 4070,2960 4540,2960 4645,2855 v2@4645,2825
  Bottom Layer w10: UART1.2@1425,2310 4135,2310 v2(4645,2820)
RX3: U5.63 UART2.2 | length 3909.1
  Top Layer w10: U5.63 4000,4266.72 4210,4476.72 4210,4750 v2(4070,4890)
  Bottom Layer w10: UART2.2 3765,4585 v2(4070,4890)
"RX LED": LED2.1 U6.22 | length 1547
  Top Layer w10: U6.22 3062.8,1997.8 3160,2095 3530,2095 3597.68,2027.32 v2@3597.68,1715 ; LED2.1@3600,1137.32 v2(3600,1235)
  Bottom Layer w10: v2(3600,1235) v2(3600,1705)
SCK: +5V.39 +5V.91 JTAG1.3 U5.20 | length 5325
  Top Layer w10: U5.20 4137.8,3146.15 4171.62,3112.32 4596.11,3112.32 4698.43,3010 5371.57,3010 5459.53,3097.96 5459.53,3204.03 5403.55,3260 JTAG1.3 ; v3(5800,2900) 5800,3420 6100,3720 6100,4530 6522,4952 +5V.39@6845,4952
  Bottom Layer w10: JTAG1.3 5440,3260 v3(5800,2900) ; v1(6575,4950) 6575,5085 6640,5150 +5V.91
"SCK_Sensor Boom": 
SCL: I2C.2 R9.2 U5.43 | length 6640.7
  Top Layer w10: U5.43 4521.71,3598.43 ; 4523.28,3600 4795,3871.72 4795,4383.14 4906.86,4495 5512.68,4495 R9.2 5287.68,5090 v2(5195,5090)
  Bottom Layer w10: I2C.2 2613.43,4950 2733.43,4830 3053.28,4830 3308.28,5085 5190,5085 v2(5195,5090)
SCLK: 
SDA: I2C.4 R8.1 U5.44 | length 5793.2
  Top Layer w10: U5.44 4483.11,3618.11 4755,3890 4755,4575 5040,4860 ; R8.1 5040,4860 ; v2@5165,4860 5040,4860
  Bottom Layer w10: I2C.4 2685.15,4850 2725.15,4810 3061.57,4810 3316.57,5065 4970,5065 v2(5175,4860)
SensorP_sel: +5V.36 U5.35 | length 3048.6
  Top Layer w10: U5.35 4795.94,3440.94 v1(5115,3760) ; v1(6345,4435) 6560,4650 +5V.36
  Bottom Layer w10: v1(5115,3760) 5510,4155 5938.28,4155 6218.28,4435 v1(6345,4435)
Sin: 
Sout: 
SS: 
TEMP: +5V.49 R3.1 U5.82 | length 9870.5
  Top Layer w10: R3.1 1262.68,5465 ; 3126.64,4131.64 2993.28,4265 ; U5.82 3640.17,3618.11 2993.28,4265 ; +5V.49@6842,5935 6827,5950 6045,5950 5785,5690 1340,5690 1262.68,5612.68 1262.68,5465 ; 1262.68,5465 1170,5372.32 1170,4820 1240,4750 2508.28,4750 2993.28,4265
"Thermal Sensor Resistor": 
TLED: LED1.2 R6.1 | length 332.6
  Top Layer w10: LED1.2 4537.68,1135 R6.1
TX2: U5.13 UART1.4 | length 4618.1
  Top Layer w10: U5.13 4000,3070 4080,2990 4610,2990 v2(4775,2825)
  Bottom Layer w10: UART1.4@1425,2200 3408.43,2200 3443.43,2235 4185,2235 v2(4775,2825)
TX3: U5.64 UART2.4 | length 3638
  Top Layer w10: U5.64 3980.32,4275.31 4190,4485 4190,4555 v2(4070,4675)
  Bottom Layer w10: UART2.4 3880,4485 v2(4070,4675)
"TX LED": LED1.1 U6.23 | length 2048.6
  Top Layer w10: U6.23 3058.39,2023.39 3150,2115 3605,2115 3695,2025 3833.43,2025 3958.43,1900 4132.68,1900 v2@4242.68,1790 ; LED1.1@4240,1142.68 v2(4240,1250)
  Bottom Layer w10: v2(4240,1250) v2(4240,1775)
UC_RX: R4.1 U5.2 | length 1839.9
  Top Layer w10: R4.1 2427.68,2192.68 3105,2870 3490.12,2870 3783.46,3163.35 U5.2
UC_TX: R5.1 U5.3 | length 2174.1
  Top Layer w10: R5.1 2470,1857.32 2470,2180 2546.6,2256.6 2905,2256.6 3802.83,3154.43 ; 3803.15,3154.75 U5.3
USB5V: +5V.2 R12.2 | length 3802.7
  Top Layer w10: R12.2 3170,1327.32 5967.68,1327.32 6045,1250 +5V.2
"USB DM": +5V.4 U6.16 | length 4038.4
  Top Layer w10: U6.16 3030,1844.25 3035.59,1838.66 3038.28,1838.66 3461.95,1415 6665,1415 6700,1450 +5V.4
"USB DP": +5V.3 U6.15 | length 4040.2
  Top Layer w10: U6.15 3030,1818.66 3458.66,1390 6660,1390 6700,1350 +5V.3
VCC:  | length 7.1
  Top Layer w10: 5290,3165 5295,3160
VPRG: +5V.89 U5.36 | length 3482.2
  Top Layer w10: U5.36 4573.77,3460.63 4945,3831.86 4945,4260 4995,4310 v1(5705,4310)
  Bottom Layer w10: v1(5705,4310) 5975,4310 6310,4645 6310,4718.18 6335,4743.18 6335,4745 6420,4745 6420,4739.64 6434.64,4725 6455.36,4725 6470,4739.64 6470,4745 6510.36,4745 6715.36,4950 +5V.89
XERR: +5V.96 U5.42 | length 4073.4
  Top Layer w10: U5.42 4538.74,3578.74 4835,3875 4835,4394.85 4915.15,4475 5520.96,4475 5625.96,4580 v1(5735,4580) ; v1(5905,4580) 5905,5200 6205,5500 6475,5500 v1(6575,5600)
  Bottom Layer w10: v1(5735,4580) v1(5905,4580) ; v1(6575,5600) 6625,5650 +5V.96
XLat: +5V.92 U5.37 | length 3781.8
  Top Layer w10: U5.37 4565.17,3480.32 4925,3840.15 4925,4365 4955,4395 5554.1,4395 5569.1,4410 v1(5735,4410) ; v1(6070,4603.28) 6295,4828.28 6295,5145 6350,5200 v1(6600,5200)
  Bottom Layer w10: v1(5735,4410) 5890.36,4410 6055,4574.64 6055,4588.28 v1(6070,4603.28) ; v1(6600,5200) 6640,5200 6690,5250 +5V.92
XTAL1: C6.2@5602.68,3745 U5.33 Y1.1 | length 1423.2
  Top Layer w10: U5.33 4976.57,3401.57 5302.68,3727.68 Y1.1 5585.35,3727.68
XTAL2: C8.2 U5.34 Y1.2 | length 1644.9
  Top Layer w10: U5.34 4836.26,3421.26 5330,3915 Y1.2 C8.2@5590.35,4062.32
pads on no net: +5V.5 +5V.6 +5V.7 +5V.8 +5V.9 +5V.10 +5V.11 +5V.12 +5V.13 +5V.14 +5V.15 +5V.16 +5V.17 +5V.18 +5V.19 +5V.20 +5V.21 +5V.22 +5V.23 +5V.24 +5V.25 +5V.26 +5V.27 +5V.28 +5V.29 +5V.30 +5V.31 +5V.32 +5V.33 +5V.34 +5V.35 +5V.50 +5V.51 +5V.52 +5V.53 +5V.54 +5V.55 +5V.56 +5V.57 +5V.58 +5V.59 +5V.60 +5V.61 +5V.62 +5V.63 +5V.64 +5V.65 +5V.66 +5V.67 +5V.68 +5V.69 +5V.70 +5V.71 +5V.72 +5V.73 +5V.74 +5V.75 +5V.76 +5V.77 +5V.78 +5V.79 +5V.80 +5V.81 +5V.82 +5V.83 +5V.84 +5V.85 +5V.86 +5V.87 ?.1@3607.5,2695 ?.5 ?.6 ?.7 ?.8 I2C.3 JTAG1.2 U5.1 U5.5 U5.6 U5.7 U5.14 U5.15 U5.16 U5.17 U5.18 U5.19 U5.23 U5.26 U5.27 U5.28 U5.29 U5.39 U5.45 U5.46 U5.47 U5.48 U5.51 U5.52 U5.55 U5.56 U5.57 U5.58 U5.59 U5.60 U5.65 U5.66 U5.67 U5.68 U5.69 U5.70 U5.71 U5.72 U5.74 U5.75 U5.76 U5.77 U5.78 U5.79 U6.3 U6.6 U6.8 U6.9 U6.10 U6.11 U6.12 U6.13 U6.14 U6.24 U6.27 U6.28

## Keep-outs
Keep-Out Layer:
  lines w7.87: 1000,1000 1000,6000 7005,6000 7005,1005 7000,1000 1000,1000

## Other copper
Top Layer:
  rectangle net GND: 6705,5625 6985,5775
  rectangle net +5V: 6710,1070 6980,1135

## Silkscreen, mask and mechanical layers (free items; w line width, h text height)
Top Overlay:
  circle w10: c3570,4150 r93.75
  circle w10: c1110,5890 r93.75
  circle w10: c1110,1110 r93.75
  text "TEMP" at 5745,5885 h60
  text "ExPre" at 6040,5755 h60
  text "GND" at 6500,5625 h60
  text "USCAUV" at 1845,5355 h100 r90
  text "ADC 14" at 1610,4185 h60
  text "Kanaloa" at 2010,2685 h200 r90
  text "i ka holoholo kai" at 2310,2345 h150 r90
  text "USB DM" at 6290,1420 h60
  text "USB DP" at 6290,1300 h60

## Text inside footprints (layer, text, board x,y; h text height)
"ADC 0": Top Overlay "2" at 1515,4265 h50 r270; Top Overlay "1" at 1415,4265 h50 r270; Top Overlay "29" at 1415,2705 h50 r270; Top Overlay "30" at 1515,2705 h50 r270
I2C: Top Overlay "1" at 1410,5030 h50 r270; Top Overlay "2" at 1510,5030 h50 r270; Top Overlay "4" at 1510,4790 h50 r270; Top Overlay "3" at 1410,4790 h50 r270
JTAG1: Top Overlay "1" at 5415,3080 h50 r90; Top Overlay "2" at 5315,3060 h50 r90; Top Overlay "5" at 5415,3420 h50 r90; Top Overlay "6" at 5315,3420 h50 r90
UART1: Top Overlay "3" at 1310,2145 h50 r270; Top Overlay "4" at 1410,2145 h50 r270; Top Overlay "2" at 1410,2385 h50 r270; Top Overlay "1" at 1310,2385 h50 r270
UART2: Top Overlay "3" at 1405,4425 h50 r270; Top Overlay "4" at 1505,4425 h50 r270; Top Overlay "2" at 1505,4665 h50 r270; Top Overlay "1" at 1405,4665 h50 r270